# Altium PCB main_board.PcbDoc
Units mm, origin at the board's own origin, x right, y up, seen from the top; angles counter-clockwise.
Board outline 93.7 x 62.75 mm, 2 copper layers (Top Layer, Bottom Layer); 96 components, 66 nets, 378 pads, 214 vias.
Unrouted connection lines stored in the file: 1.
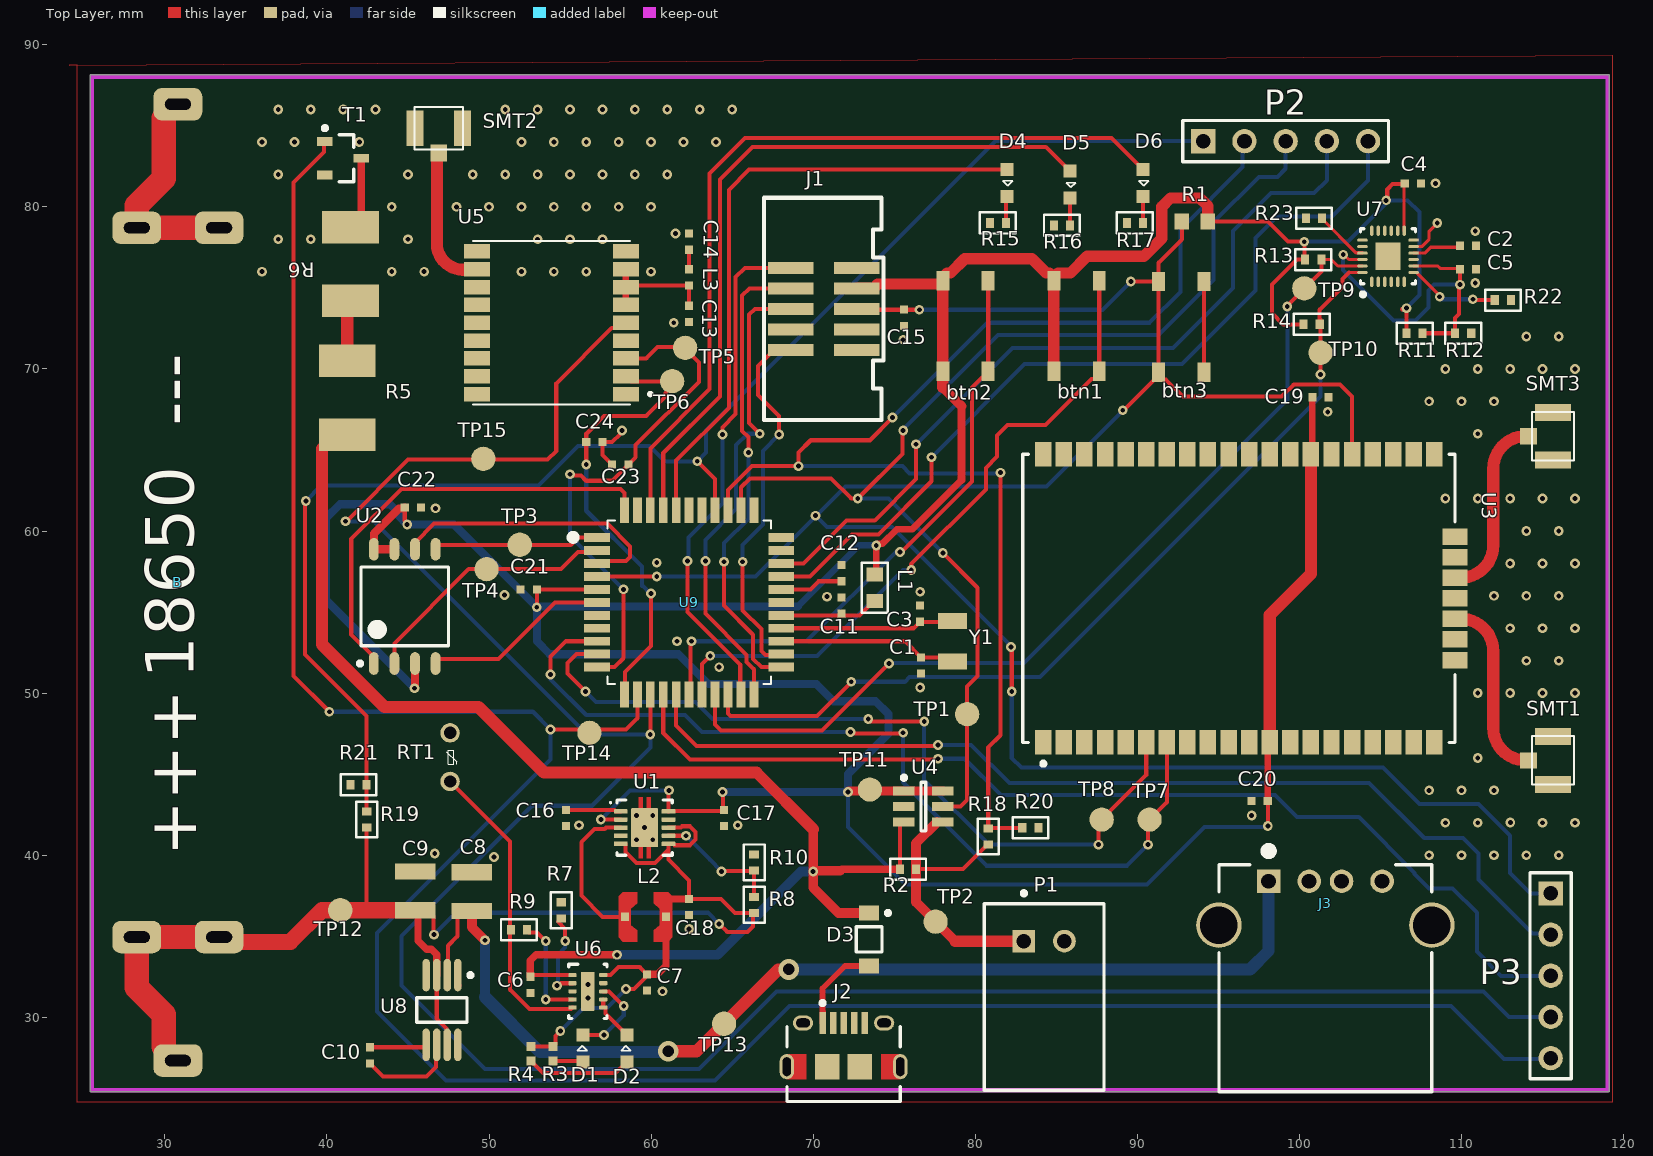
[diagram p0: Top Layer view]
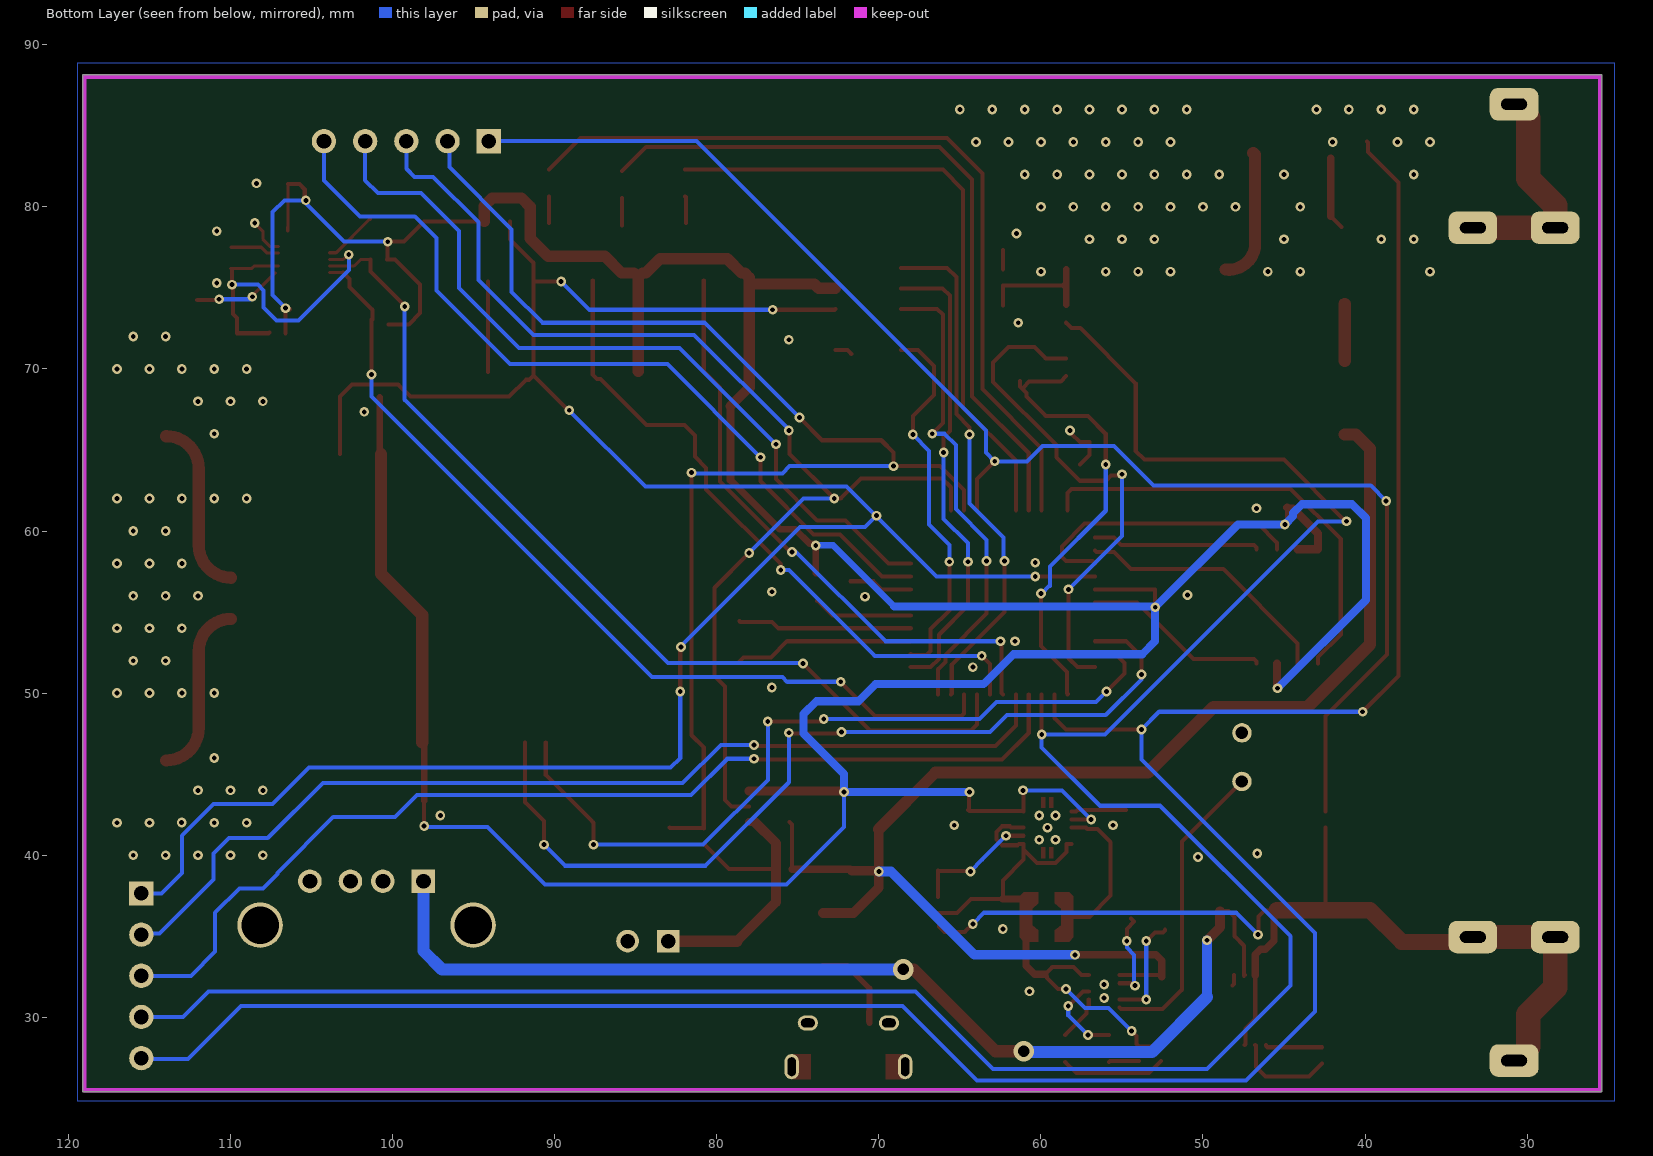
[diagram p1: Bottom Layer view, seen from below]
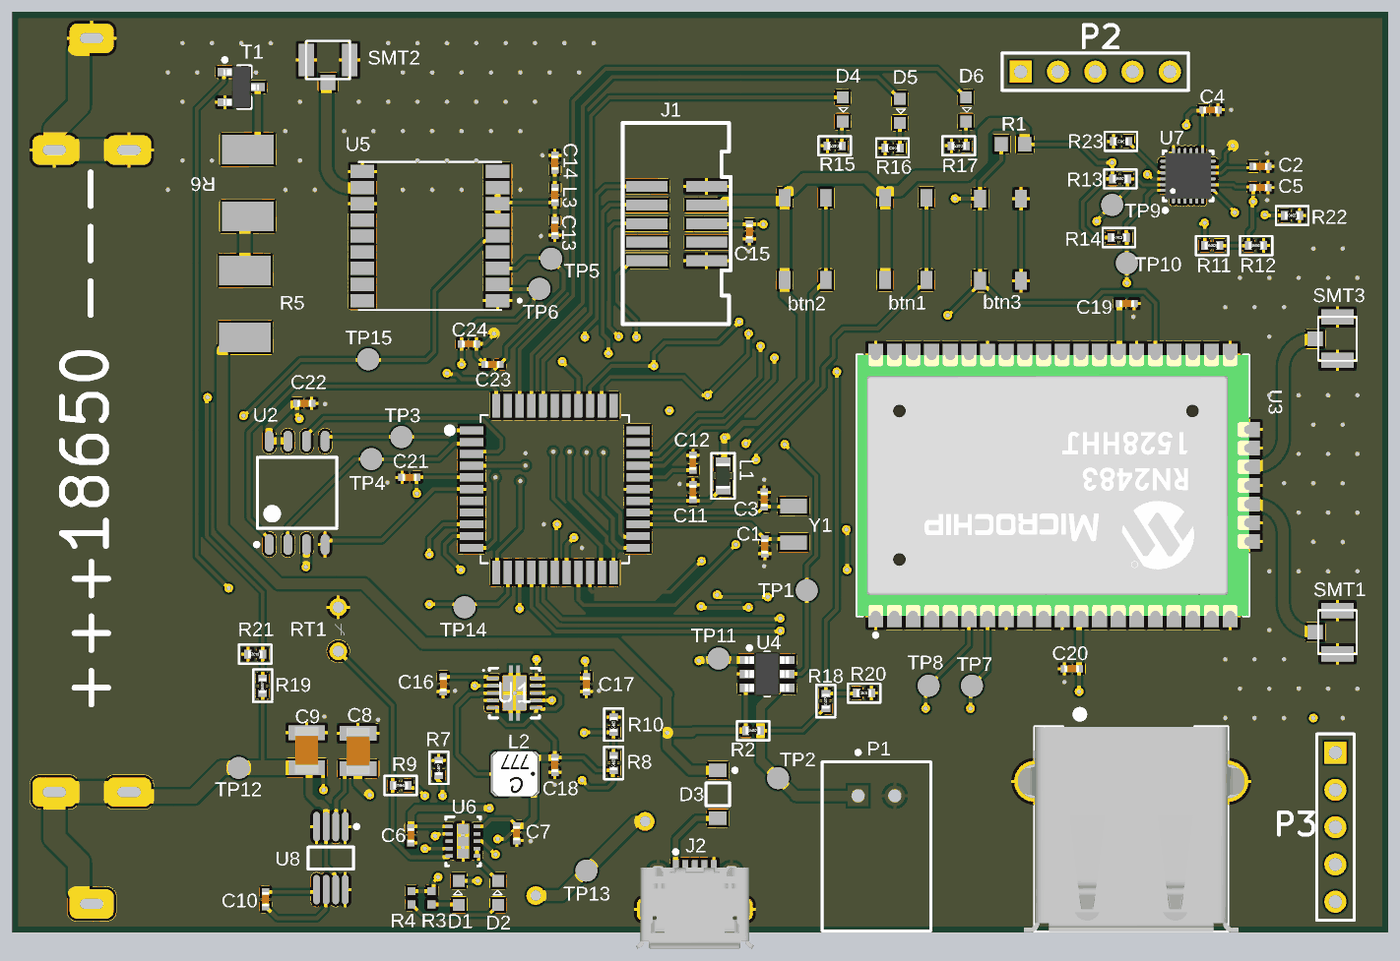
[diagram p2: 3D render of the assembled board from above, using the file's embedded part models]

## Layer stack, top to bottom
Top Solder: solder mask 0.0102, Solder Resist, Dk 3.5
Top Layer: signal copper 0.0356
Dielectric 1: dielectric 0.32, FR-4, Dk 4.8
Bottom Layer: signal copper 0.0356
Bottom Solder: solder mask 0.0102, Solder Resist, Dk 3.5

## Board outline
25.4,25.4 119.1,25.4 119.1,88.15 25.4,88.15

## Design rules (kind name [scope] priority, off if disabled: settings)
Clearance [All] p1: gap=0.16 ignorepadtopadclearanceinfootprint=FALSE except(0: Arc-Text Arc-Hole Track-Text Track-Hole SMDPad-Text SMDPad-Hole THPad-Text THPad-Hole Via-Text Via-Hole Fill-Text Fill-Hole Poly-Text Poly-Hole Region-Text Region-Hole Text-Text Text-Hole)
DiffPairsRouting [All] p1: maxlimit=0.254 minlimit=0.254 mostfreqgap=0.254 toplayer_minwidth=0.16 toplayer_maxwidth=0.381 toplayer_prefwidth=0.2 bottomlayer_minwidth=0.16 bottomlayer_maxwidth=0.381 bottomlayer_prefwidth=0.2 maxuncoupledlength=12.7
Height [All] p1: minheight=0 maxheight=200 prefheight=12.7
HoleSize [All] p1: absolutevalues=TRUE maxlimit=6.35 minlimit=0.3 maxpercent=80.000 minpercent=20.000
MinimumSolderMaskSliver [All] p1: minsoldermaskwidth=0.1
PlaneClearance [All] p1: clearance=1
PlaneConnect [All] p1: planeconnectstyle=Relief reliefexpansion=0.508 reliefentries=4 reliefconductorwidth=1 reliefairgap=0.254
PolygonConnect PolygonConnect_1 [IsVia] p1: connectstyle=Direct reliefconductorwidth=0.254 reliefentries=4 polygonreliefangle="90 Angle" airgapwidth=0.254
PolygonConnect [All] p2: connectstyle=Relief reliefconductorwidth=0.2 reliefentries=4 polygonreliefangle="90 Angle" airgapwidth=0.2
RoutingVias [All] p1: holewidth=0.3 width=0.6 viastyle="Through Hole" minholewidth=0.3 minwidth=0.6 maxholewidth=6.35 maxwidth=10
SilkToSolderMaskClearance [IsPad] p1: minsilkscreentomaskgap=0.178 clearancetoexposedcopper=TRUE
SolderMaskExpansion [All] p1: expansion=0.102
Width [All] p1: maxlimit=5 minlimit=0.16 preferedwidth=0.25 minimp=50.000000 maximp=50.000000 favimp=50.000000
23 further rules are at their usual default settings.

## Components (designator, comment, footprint, x,y, rotation, side; value= is the part's Value field where it differs from the comment)
B "18650" 18650 30.81,27.33 r90 top
btn1 "KSC222G LFS" "KSC222G LFS" 86.25,72.65 r0 top
btn2 "KSC222G LFS" "KSC222G LFS" 79.4,72.65 r0 top
btn3 "KSC222G LFS" "KSC222G LFS" 92.7,72.6 r0 top
C1 "04023C103KAT2A" C0402 76.65,51.7 r90 top value=22pF
C2 "04023C103KAT2A" C0402 110.4,77.6 r180 top value=100nF
C3 "04023C103KAT2A" C0402 76.6,54.9 r270 top value=22pF
C4 "04023C103KAT2A" C0402 107,81.45 r180 top value=100nF
C5 "04023C103KAT2A" C0402 110.4,76.15 r180 top value=100nF
C6 "04023C103KAT2A" C0402 52.55,32 r270 top value=1uF
C7 "04023C103KAT2A" C0402 59.75,32.15 r270 top value=1uF
C8 "TCJB106M016R0100" C3528 45.45,37.8 r90 top value=10uF
C9 "TCJB106M016R0100" C3528 48.95,37.75 r90 top value=10uF
C10 "04023C103KAT2A" C0402 42.65,27.65 r270 top value=1uF
C11 "04023C103KAT2A" C0402 71.75,55.4 r270 top value=100nF
C12 "04023C103KAT2A" C0402 71.75,57.4 r270 top value=100nF
C13 "04023C103KAT2A" C0402 62.35,73.4 r90 top value="56 pF"
C14 "04023C103KAT2A" C0402 62.35,77.85 r270 top value="10 nF"
C15 "04023C103KAT2A" C0402 75.6,73.156 r90 top value=1uF
C16 "04023C103KAT2A" C0402 54.75,42.3 r90 top value=1uF
C17 "04023C103KAT2A" C0402 64.5,42.3 r270 top value=20uF
C18 "04023C103KAT2A" C0402 62.35,36.8 r270 top value=10uF
C19 "04023C103KAT2A" C0402 101.297,68.25 r180 top value=100nF
C20 "04023C103KAT2A" C0402 97.547,43.35 r0 top value=100nF
C21 "04023C103KAT2A" C0402 52.45,56.4 r180 top value=100nF
C22 "04023C103KAT2A" C0402 45.3,61.45 r180 top value=100nF
C23 "04023C103KAT2A" C0402 58.1,64.1 r180 top value="56 pF"
C24 "04023C103KAT2A" C0402 56.5,65.5 r180 top value="56 pF"
D1 "Green LED" "LED 0603" 55.8,28.9 r270 top
D2 "Green LED" "LED 0603" 58.5,28.9 r270 top
D3 "MBR0520L" ONSC-SOD-123-2-425-04_V 73.45,34.8 r270 top
D4 "Green LED" "LED 0603" 81.95,80.65 r90 top
D5 "Green LED" "LED 0603" 85.85,80.55 r90 top
D6 "Green LED" "LED 0603" 90.35,80.65 r90 top
J1 "SHF-105-01-L-D-SM" "JTAG HEADER" 70.65,73.7 r270 top
J2 "10118194-0001LF" FCI-10118194-0001LF-5_V 71.877,28.3 r0 top
J3 "292303-1" TE-292303-1_V 101.6,37.25 r0 top
L1 "MLZ1608A2R2WT" "INDUCTOR 0603" 73.8,56.5 r270 top value=10uH
L2 "LPS3015-222MRB" COIL-LPS3015_V 59.65,36.2 r180 top
L3 "LQG15HN27NJ02D" "INDUCTOR 0402" 62.35,75.65 r90 top value="27 nH"
P1 "S2B-XH-A(LF)(SN)" JST-S2B-XH-A(LF)(SN)_V 84.25,34.7 r0 top
P2 "Header 5" HDR1X5 94.07,84.05 r0 top
P3 "Header 5" HDR1X5 115.5,37.64 r270 top
R1 "10k" RESC0603(1608)_N 93.55,79.1 r0 top
R2 "CRCW04020000Z0ED" R0402 75.85,39.136 r0 top value="0.18 ohm"
R3 "2k" RESC0402(1005)_L 53.95,27.75 r90 top
R4 "2k" RESC0402(1005)_L 52.6,27.75 r90 top
R5 "35228R2JT" R6432 41.2,68.2 r90 top value=8.2ohm
R6 "35228R2JT" R6432 41.5,76.5 r270 top value=8.2ohm
R7 "CRCW04020000Z0ED" R0402 54.45,36.6 r90 top value=1.18kOhm
R8 "CRCW04020000Z0ED" R0402 66.35,36.933 r90 top value=2.26Mohm
R9 "CRCW04020000Z0ED" R0402 51.85,35.4 r180 top value=17.4kohm
R10 "CRCW04020000Z0ED" R0402 66.35,39.55 r90 top value=249kohm
R11 "CRCW04020000Z0ED" R0402 107.1,72.2 r0 top value=165kohm
R12 "CRCW04020000Z0ED" R0402 110.1,72.2 r0 top value=200kohm
R13 "CRCW04020000Z0ED" R0402 100.85,76.75 r0 top value=10kohm
R14 "CRCW04020000Z0ED" R0402 100.75,72.75 r0 top value=10kohm
R15 "CRCW04020000Z0ED" R0402 81.4,79 r180 top value=300
R16 "CRCW04020000Z0ED" R0402 85.35,78.85 r180 top value=300
R17 "CRCW04020000Z0ED" R0402 89.85,79 r180 top value=300
R18 "CRCW04020000Z0ED" R0402 80.8,41.15 r90 top value="? kohm"
R19 "CRCW04020000Z0ED" R0402 42.45,42.2 r90 top value=41.2kohm
R20 "CRCW04020000Z0ED" R0402 83.4,41.7 r0 top value="? kohm"
R21 "CRCW04020000Z0ED" R0402 41.95,44.35 r180 top value=150kohm
R22 "CRCW04020000Z0ED" R0402 112.55,74.25 r0 top value=10kohm
R23 "CRCW04020000Z0ED" R0402 100.9,79.3 r180 top value=10kohm
RT1 "B57164K0103J000" B57164K0103J000 47.6,46.05 r90 top
SMT1 "U.FL-R-SMT" *U.FL-R-SMT_U.FL-R-SMT(Primary) 115.647,45.85 r270 top
SMT2 "U.FL-R-SMT" *U.FL-R-SMT_U.FL-R-SMT(Primary) 46.9,84.85 r0 top
SMT3 "U.FL-R-SMT" *U.FL-R-SMT_U.FL-R-SMT(Primary) 115.647,65.85 r270 top
T1 "DMG6968U" DMG6968U 41,83 r0 top
TP1 "Test point" "TEST POINT" 79.5,48.7 r90 top
TP2 "Test point" "TEST POINT" 77.55,35.9 r90 top
TP3 "Test point" "TEST POINT" 51.9,59.15 r90 top
TP4 "Test point" "TEST POINT" 49.85,57.65 r90 top
TP5 "Test point" "TEST POINT" 62.1,71.3 r90 top
TP6 "Test point" "TEST POINT" 61.3,69.25 r90 top
TP7 "Test point" "TEST POINT" 90.75,42.2 r90 top
TP8 "Test point" "TEST POINT" 87.8,42.2 r90 top
TP9 "Test point" "TEST POINT" 100.3,74.973 r90 top
TP10 "Test point" "TEST POINT" 101.3,71 r90 top
TP11 "Test point" "TEST POINT" 73.5,44.05 r90 top
TP12 "Test point" "TEST POINT" 40.826,36.6 r90 top
TP13 "Test point" "TEST POINT" 64.5,29.6 r90 top
TP14 "Test point" "TEST POINT" 56.2,47.55 r90 top
TP15 "Test point" "TEST POINT" 49.65,64.45 r90 top
U1 "TPS61201DRCT" DRC0010J_V 59.6,41.7 r0 top
U2 "SST25VF080B-50-4I-S2AF" MCHP-SOIC-S2A8_L 44.8,55.35 r90 top
U3 "RN2483A-I/RM103" MCHP-MODULE-47_V 96.897,55.85 r90 top
U4 "MAX44284FAUT+T" MAXM-U6_V 76.8,43 r0 top
U5 "TESEO-LIV3F" *TESEO-LIV3F 53.85,72.85 r270 top
U6 "BQ24210DQCT" DQC0010A 56.1,31.6 r0 top
U7 "ICM-20948" TDK-QFN-24_L 105.464,76.95 r90 top
U8 "MCP1253T-33X50I/MS" MSOP-MS8_M 47.1,30.45 r270 top
U9 "ATMEGA324PB-AU" *QFP80P1200X1200X120-44N 62.35,55.6 r0 top
Y1 "9HT10-32.768KEZC-T" 9HT10-32.768KEZC-T 78.6,51.95 r90 top

## Footprints (in the part's own frame and the unit in brackets; to place one, negate y for a bottom-side part, rotate by r counter-clockwise, add the part's x,y. Pads: shape width x height; smd on the part's side, far side on the other; paste and mask are expansions set on the pad)
9HT10-32.768KEZC-T [mm]
  rect 1x1.8 smd mask+0.2: 1(0,0) 2(2.5,0)
18650 [mm] "18650 battery holder"
  rrect50% 2x3 hole 1.6 slot 0.7 at 0 deg mask+0.2: 1(0,0) 1(7.62,-2.54) 1(7.62,2.54) 2(51.38,-2.54) 2(51.38,2.54) 2(59,0)
*QFP80P1200X1200X120-44N [mm]
  rect 1.6x0.55 smd mask+0.2: 1(-5.68,4) 2(-5.68,3.2) 3(-5.68,2.4) 4(-5.68,1.6) 5(-5.68,0.8) 6(-5.68,0) 7(-5.68,-0.8) 8(-5.68,-1.6) 9(-5.68,-2.4) 10(-5.68,-3.2) 11(-5.68,-4) 23(5.68,-4) 24(5.68,-3.2) 25(5.68,-2.4) 26(5.68,-1.6) 27(5.68,-0.8) 28(5.68,0) 29(5.68,0.8) 30(5.68,1.6) 31(5.68,2.4) 32(5.68,3.2) 33(5.68,4)
  rect 0.55x1.6 smd mask+0.2: 12(-4,-5.68) 13(-3.2,-5.68) 14(-2.4,-5.68) 15(-1.6,-5.68) 16(-0.8,-5.68) 17(0,-5.68) 18(0.8,-5.68) 19(1.6,-5.68) 20(2.4,-5.68) 21(3.2,-5.68) 22(4,-5.68) 34(4,5.68) 35(3.2,5.68) 36(2.4,5.68) 37(1.6,5.68) 38(0.8,5.68) 39(0,5.68) 40(-0.8,5.68) 41(-1.6,5.68) 42(-2.4,5.68) 43(-3.2,5.68) 44(-4,5.68)
  silkscreen extent -7.36,-5.05 5.05,5.05
*TESEO-LIV3F [mm]
  rect 0.9x1.6 smd mask+0.2: 1(4.4,4.6) 2(3.3,4.6) 3(2.2,4.6) 4(1.1,4.6) 5(0,4.6) 6(-1.1,4.6) 7(-2.2,4.6) 8(-3.3,4.6) 9(-4.4,4.6) 10(-4.4,-4.6) 11(-3.3,-4.6) 12(-2.2,-4.6) 13(-1.1,-4.6) 14(0,-4.6) 15(1.1,-4.6) 16(2.2,-4.6) 17(3.3,-4.6) 18(4.4,-4.6)
  silkscreen extent -5.05,-4.85 5.05,6.2
*U.FL-R-SMT_U.FL-R-SMT(Primary) [mm]
  rect 1x1.05 smd mask+0.2: P$1(0,-1.525)
  rect 1.05x2.2 smd mask+0.2: P$2(1.475,0) P$3(-1.475,0)
  silkscreen extent -1.5,-1.3 1.5,1.3
B57164K0103J000 [mm] "Thermistor, through hole, R25=10kohm"
  round 1.2 hole 0.762 mask+0.2: 1(1.5,0) 2(-1.5,0)
  silkscreen extent -0.43,-0.41 0.42,0.23
C0402 [mm]
  rect 0.5x0.5 smd mask+0.2: 1(-0.5,0) 2(0.5,0)
  body extent -0.5,-0.25 0.5,0.25, height 0.5
C3528 [mm] "Low ESR (0.1ohm), 10uF"
  rect 1x2.5 smd mask+0.2: 1(-1.2,0) 2(1.2,0)
  body extent -1.6,-0.8 1.6,0.8, height 1.25
COIL-LPS3015_V [mm] "SMD, 2-Leads, Body 2.95x2.95mm"
  rect 0.5x0.5 smd mask+0.2: 1(-1.27,0) 2(1.27,0)
  Top Layer region: -0.51,1.525 -1.395,1.525 -1.395,1.525 -1.65,1.27 -1.65,-1.27 -1.395,-1.525 -0.51,-1.525 -0.51,-0.825 -0.89,-0.51 -0.89,-0.51 -0.89,0.51 -0.51,0.825 -0.51,0.825
  Top Layer region: 0.51,1.525 1.395,1.525 1.395,1.525 1.65,1.27 1.65,-1.27 1.395,-1.525 0.51,-1.525 0.51,-0.825 0.89,-0.51 0.89,-0.51 0.89,0.51 0.51,0.825 0.51,0.825
  body extent -1.58,-1.58 1.58,1.58, height 1.5
DMG6968U [mm] "SOT23, 3-Leads, Body 2.85x2.35mm, Pitch 1.03mm, IPC Medium Density"
  rect 0.95x0.55 smd mask+0.2: 1(-1.125,1.03) 2(-1.125,-1.03) 3(1.125,0)
  silkscreen extent -1.25,-1.45 0.65,1.98, body extent -1.2,-1.45 1.2,1.45, height 1.02
DQC0010A [mm] "SON, 10-Leads, Body 2x3mm, Pitch 0.5mm, Thermal Pad 2.4x0.84mm"
  rrect40% 0.5x0.25 smd mask+0.2: 1(-0.95,1) 2(-0.95,0.5) 3(-0.95,0) 4(-0.95,-0.5) 5(-0.95,-1) 6(0.95,-1) 7(0.95,-0.5) 8(0.95,0) 9(0.95,0.5) 10(0.95,1)
  rrect12% 0.84x2.4 smd paste-0.42 mask+0.2: 11(0,0)
  silkscreen extent -1.17,-1.68 1.17,1.67, body extent -1.05,-1.55 1.05,1.55, height 0.81
DRC0010J_V [mm] "SON, 10-Leads, Body 3x3mm, Pitch 0.5mm, Thermal Pad 2.4x1.65mm, TI Recommended"
  rrect36% 0.85x0.28 smd paste-0.025 mask+0.2: 1(-1.475,1) 2(-1.475,0.5) 3(-1.475,0) 4(-1.475,-0.5) 5(-1.475,-1) 6(1.475,-1) 7(1.475,-0.5) 8(1.475,0) 9(1.475,0.5) 10(1.475,1)
  rrect6% 1.65x2.4 smd paste-0.825 mask+0.2: 11(0,0)
  Top Layer region: -0.39,-1.9 -0.11,-1.9 -0.11,-1.2 -0.39,-1.2
  Top Layer region: 0.39,-1.2 0.11,-1.2 0.11,-1.9 0.39,-1.9
  Top Layer region: 0.39,1.9 0.11,1.9 0.11,1.2 0.39,1.2
  Top Layer region: -0.39,1.2 -0.11,1.2 -0.11,1.9 -0.39,1.9
  silkscreen extent -2.15,-1.7 1.7,1.7, body extent -1.55,-1.55 1.55,1.55, height 1
FCI-10118194-0001LF-5_V [mm] "SMD, 5-Leads, Body 7x5mm, Pitch 0.65 mm"
  rect 0.4x1.35 smd mask+0.2: 1(-1.3,1.35) 2(-0.65,1.35) 3(0,1.35) 4(0.65,1.35) 5(1.3,1.35)
  oval 1.25x0.95 hole 0.55 slot 0.85 at 0 deg mask+0.2: 6(-2.5,1.35) 7(2.5,1.35)
  oval 0.9x1.55 hole 0.5 slot 1.15 at 90 deg mask+0.2: 8(-3.5,-1.35) 9(3.5,-1.35)
  rect 1.5x1.55 smd mask+0.2: 10(-1,-1.35) 11(1,-1.35)
  Top Layer region: 3.5,-2.125 3.5,-0.575 2.3,-0.575 2.3,-2.125
  Top Layer region: -2.3,-2.125 -2.3,-0.575 -3.5,-0.575 -3.5,-2.125
  silkscreen extent -3.5,-3.5 3.5,2.7, body extent -4.02,-4.03 4.02,1.55, height 2.72
HDR1X5 [mm] "Connector; Header; 5 Position"
  rect 1.5x1.5 hole 0.9: 1(0,0)
  round 1.5 hole 0.9: 2(2.54,0) 3(5.08,0) 4(7.62,0) 5(10.16,0)
  silkscreen extent -1.27,-1.27 11.43,1.27
"INDUCTOR 0402" [mm]
  rect 0.5x0.5 smd mask+0.2: 1(-0.5,0) 2(0.5,0)
  body extent -0.5,-0.25 0.5,0.25, height 0.5
"INDUCTOR 0603" [mm]
  rect 0.88x0.99 smd mask+0.2: 1(-0.815,0) 2(0.815,0)
  silkscreen extent -1.55,-0.8 1.55,0.8, body extent -0.87,-0.48 0.88,0.48, height 0.91
JST-S2B-XH-A(LF)(SN)_V [mm] "Header, 2-Leads, Body 7.4x11.5mm, Pitch 2.5mm"
  rect 1.4x1.4 hole 0.9 mask+0.2: 1(-1.25,0)
  round 1.4 hole 0.9 mask+0.2: 2(1.25,0)
  silkscreen extent -3.7,-9.2 3.7,3.08, body extent -3.7,-9.2 3.7,2.3, height 6.1
"JTAG HEADER" [mil] "10-pin, 1.27 mm"
  rect 29x110 smd mask+7.87: 1(-100,-80) 2(-100,80) 3(-50,-80) 4(-50,80) 5(0,-80) 6(0,80) 7(50,-80) 8(50,80) 9(100,-80) 10(100,80)
  silkscreen extent -270,-145 270,145
"KSC222G LFS" [mm]
  rect 0.8x1.2 smd mask+0.2: 1(-1.4,2.794) 2(-1.4,-2.794) 3(1.4,2.794) 4(1.4,-2.794)
  body extent -2.29,-3.06 2.29,3.05, height 1.5
"LED 0603" [mm] "1.6mmX0.8mm SMD, 2mA"
  rect 0.8x0.8 smd mask+0.2: 1(1.65,0) 2(0,0)
  silkscreen extent 0.65,-0.35 0.95,0.25
MAXM-U6_V [mm] "SOT23, 6-Leads, Body 3x1.75mm, Pitch 0.95mm"
  rect 1.33x0.56 smd mask+0.2: 1(-1.2,0.95) 2(-1.2,0) 3(-1.2,-0.95) 4(1.2,-0.95) 5(1.2,0) 6(1.2,0.95)
  silkscreen extent -1.32,-1.5 0.15,1.9, body extent -1.5,-1.5 1.5,1.5, height 1.45
MCHP-MODULE-47_V [mil] "SMD, 47-Leads, Body 26.67x17.78mm, Pitch 1.27mm"
  rect 60x40 smd mask+7.87: 1(-350,500) 2(-350,450) 3(-350,400) 4(-350,350) 5(-350,300) 6(-350,250) 7(-350,200) 8(-350,150) 9(-350,100) 10(-350,50) 11(-350,0) 12(-350,-50) 13(-350,-100) 14(-350,-150) 15(-350,-200) 16(-350,-250) 17(-350,-300) 18(-350,-350) 19(-350,-400) 20(-350,-450) 28(350,-450) 29(350,-400) 30(350,-350) 31(350,-300) 32(350,-250) 33(350,-200) 34(350,-150) 35(350,-100) 36(350,-50) 37(350,0) 38(350,50) 39(350,100) 40(350,150) 41(350,200) 42(350,250) 43(350,300) 44(350,350) 45(350,400) 46(350,450) 47(350,500)
  rect 40x60 smd mask+7.87: 21(-150,-500) 22(-100,-500) 23(-50,-500) 24(0,-500) 25(50,-500) 26(100,-500) 27(150,-500)
  silkscreen extent -407,-500 350,550, body extent -350,-500 350,550, height 131
MCHP-SOIC-S2A8_L [mm] "SOIC, 8-Leads, Body 5.275x5.275mm, Pitch 1.27mm, IPC High Density"
  oval 1.4x0.6 smd mask+0.2: 1(-3.525,1.905) 2(-3.525,0.635) 3(-3.525,-0.635) 4(-3.525,-1.905) 5(3.525,-1.905) 6(3.525,-0.635) 7(3.525,0.635) 8(3.525,1.905)
  silkscreen extent -3.65,-2.7 2.43,2.88, body extent -2.7,-2.7 2.7,2.7, height 2.16
MSOP-MS8_M [mm] "TSOP, 8-Leads, Body 3x3mm, Pitch 0.65mm, IPC Low Density"
  oval 2x0.45 smd mask+0.2: 1(-2.15,0.975) 2(-2.15,0.325) 3(-2.15,-0.325) 4(-2.15,-0.975) 5(2.15,-0.975) 6(2.15,-0.325) 7(2.15,0.325) 8(2.15,0.975)
  silkscreen extent -2.27,-1.55 0.75,1.88, body extent -1.55,-1.55 1.55,1.55, height 1.1
ONSC-SOD-123-2-425-04_V [mm] "SOD, 2-Leads, Body 2.69x1.6mm"
  rect 0.91x1.22 smd mask+0.2: 1(-1.635,0) 2(1.635,0)
  silkscreen extent -1.76,-0.8 0.78,1.29, body extent -1.35,-0.8 1.35,0.8, height 1.35
R0402 [mm]
  rect 0.5x0.6 smd mask+0.2: 1(-0.5,0) 2(0.5,0)
  silkscreen extent -1.1,-0.65 1.11,0.64, body extent -0.5,-0.25 0.5,0.25, height 0.35
R6432 [mm] "3W resistor SMD"
  rect 2x3.5 smd mask+0.2: 1(-2.25,-0.05) 2(2.3,-0.05)
RESC0402(1005)_L [mm] "Chip Resistor, 2-Leads, Body 1,00x0,50mm, IPC Medium Density"
  rect 0.55x0.55 smd mask+0.2: 1(-0.45,0) 2(0.45,0)
  body extent -0.53,-0.27 0.53,0.28, height 0.37
RESC0603(1608)_N [mm] "Chip Resistor, Body 1.6x0.8mm, IPC Medium Density"
  rect 0.9x1 smd mask+0.2: 1(-0.8,0) 2(0.8,0)
  body extent -0.85,-0.47 0.85,0.47, height 0.6
TDK-QFN-24_L [mm] "QFN, 24-Leads, Body 3.10x3.10mm, Pitch 0.40mm, Thermal Pad 1.70x1.54mm, IPC High Density"
  oval 0.65x0.2 smd mask+0.2: 1(-1.575,1) 2(-1.575,0.6) 3(-1.575,0.2) 4(-1.575,-0.2) 5(-1.575,-0.6) 6(-1.575,-1) 13(1.575,-1) 14(1.575,-0.6) 15(1.575,-0.2) 16(1.575,0.2) 17(1.575,0.6) 18(1.575,1)
  oval 0.2x0.65 smd mask+0.2: 7(-1,-1.575) 8(-0.6,-1.575) 9(-0.2,-1.575) 10(0.2,-1.575) 11(0.6,-1.575) 12(1,-1.575) 19(1,1.575) 20(0.6,1.575) 21(0.2,1.575) 22(-0.2,1.575) 23(-0.6,1.575) 24(-1,1.575)
  rect 1.7x1.54 smd mask+0.2: 25(0,0)
  silkscreen extent -2.47,-1.7 1.7,1.7, body extent -1.55,-1.55 1.55,1.55, height 1.05
TE-292303-1_V [mm] "THD, 4-Leads, Body 13.13x14mm, Pitch 2.5mm"
  rect 1.45x1.45 hole 0.92 mask+0.2: 1(-3.5,1.144)
  round 1.45 hole 0.92 mask+0.2: 2(-1,1.144) 3(1,1.144) 4(3.5,1.144)
  round 2.8 hole 2.3 mask+0.2: 5(-6.57,-1.566) 6(6.57,-1.566)
  silkscreen extent -6.57,-11.85 6.57,3.25, body extent -8.12,-11.85 8.12,2.15, height 7.72
"TEST POINT" [mm]
  round 1.5 smd: 1(0,0)

## Part data
btn1 btn2 btn3: "Button SMD"
  btn1: Type=SW1
  btn2: Type=SW2
  btn3: Type=RST
C1 C2 C3 C4 C5 C6 C7 C10 C11 C12 C13 C14 C15 C16 C17 C18 C19 C20 C21 C22 C23 C24: "C0402"
C8 C9: "C3528, low ESR (0.1ohm)"
D1 D2 D4 D5 D6: "LED, green, 0603, 2mA, 2.65V, SMD"
D3: library part CMP-2000-04926-1, "Schottky Diode, 20V, 0.2A, 2-pin SOD-123, RoHS, Tape and Reel", Manufacturer=FairchildSemiconductor, Operating Temperature=-65to125degC, Package=2SOD-123, Package Description="2-Pin Small Outline Diode, Body 2.69 x 1.6 mm", Package Reference=SOD-123-2-425-04, Peak Average Forward Current=0.5A, Peak Forward Voltage=0.385V, Peak Non-Repetitive Surge Current=5.5A, Peak Reverse Current=250uA, Peak Reverse Repetitive Voltage=20V, Category=Rectifier, Configuration=Single, Datasheet URL=https://datasheet.ciiva.com/5739/1684450-5739282.pdf, Datasheet Version="Rev. C0, 03/2012", Manufacturer URL=https://www.fairchildsemi.com/, Mounting=SurfaceMount, Packaging=Tape&Reel, Rad Hard=No, Type=SchottkyDiode
J1: "JTAG, 10 pin, 1.27mm", Type=JTAG
J2: library part CMP-2000-05120-1, "Micro USB B Type Receptacle, 1.8 A, -55 to 85 degC, 5-Pin SMD, RoHS, Tape and Reel", Manufacturer="Amphenol FCI", Package Description="5-Pin Surface Mount Device, Body 8.05 x 5.53 mm, Pitch 0.65 mm", Package Reference=10118194-0001LF-5, Body Orientation=RightAngle, Datasheet URL=https://datasheet.ciiva.com/26945/getdatasheetpartid-418619-26945695.pdf, Datasheet Version="Rev. A, 10/2011", Gender=RCP, Manufacturer URL=http://www.fci.com/, Mounting=SurfaceMount, Number of Contacts=5, Packaging=CutTape, Pitch=0.65mm, Rad Hard=No, Termination Method=Solder, Type=MicroUSBTypeB
J3: library part CMP-2000-05404-1, "1 Port Right Angle Through Hole Mount Female Type A USB Connector, 4 Position, -55 to 85 degC, RoHS, Tube", Manufacturer="TE Connectivity", Package Description="4-Pin Through Hole Device, Body 14 x 13.13 mm, Pitch 2.5 mm", Connector Mounting=PCB, Connector Type=USBA, Contact Material=Copper, Contact Plating=Gold, Contact Termination Type=Solder, Datasheet URL=http://www.farnell.com/cad/1653030.pdf, Datasheet Version=Feb-12, Gender=Receptacle, Manufacturer URL=http://www.te.com/, No. of Contacts=4, Package Reference=292303-1, SVHC=NoSVHC(16-Jun-2014)
L1: "Inductor 0603"
L2: library part CMP-2000-06574-1, "Shielded Power Inductor, 2.2 uH, +/- 20%, 110 mOhm, -40 to 85 degC, 2-Pin SMD, RoHS, Tape and Reel", Inductance=2.2uH, Manufacturer=Coilcraft, Maximum DC Current=2.1A, Maximum DC Resistance=110mOhms, Operating Temperature Range=-40Cto+85C, Package Description="2-Pin Surfave Mount Device, Body 2.95 x 2.95 mm", Package Reference=LPS3015, Self Resonant Frequency=110MHz, Test Frequency=100kHz, Tolerance=20%, =LPS3015-222MRC, Brand=Coilcraft, Core Material=Ferrite, Datasheet URL=http://www.coilcraft.com/pdfs/lps3015.pdf, Datasheet Version=09/2015, Factory Pack Quantity=1, Height=1.4mm, Length=3mm, Manufacturer URL=http://www.coilcraft.com/, Mounting Style=SMD/SMT, Mounting Technology=SurfaceMount, Packaging=CutTape, Product=PowerInductors, Product Category=FixedInductors, Qualification=AEC-Q200, RoHS=True, Series=LPS3015, Shielding=Shielded, Termination Style=SMD/SMT, Type=ShieldedPowerInductor, Unit Weight=0.001411oz, Width=3mm
L3: "Inductor 0402"
P1: library part CMP-1755-00005-1, "Male Header, Pitch 2.5 mm, 1 x 2 Position, Height 6.1 mm, Tail Length 3.4 mm, -25 to 85 degC, RoHS, Bulk", Capacitance="1 nF", Case\Package=Radial, Max Operating Temperature="125 degC", Min Operating Temperature="-55 degC", Package Quantity=500, Tolerance=10%, Type (Capacitors)=X7R, Voltage Rating="100 V", ComponentLink1Description="Manufacturer URL", ComponentLink1URL=http://www.jst.com/home2.html, ComponentLink2Description=Datasheet, ComponentLink2URL=http://www.jst-mfg.com/product/pdf/eng/eXH.pdf, DatasheetVersion=May-16, Height="2.54 mm", Lead Pitch="2.54 mm", Length="5.33 mm", Mount="Through Hole", PackageDescription="Male Header, Pitch 2.5 mm, 1 x 2 Position, Height 6.1 mm, Tail Length 3.4 mm", PackageReference=S2B-XH-A(LF)(SN), Packaging=Bulk, Pins=2, Radiation Hardening=No, REACH SVHC="No SVHC", RoHSCompliant=true, Voltage Rating (DC)="100 V", Width="3.81 mm"
P2 P3: "Header, 5-Pin", LatestRevisionDate=17-Jul-2002, LatestRevisionNote="Re-released for DXP Platform.", Publisher="Altium Limited"
R1: library part 5264, "0.1W 1% Thick film resistor", antall=1200, dybde=3, hylle=6, id=5264, komponenttype=1, lager_type=Baklager, leverandor=Farnell, leverandor_varenr=2447230, navn=10k, nokkelord="Resistor Motstand", pakke_opprettet="08.07.2014 21:15:30", pakke_opprettet_av=815, pakketype=0603, pris=0, produsent=Multikomp, rad=1, rom=OV, symbol_opprettet="08.07.2014 21:16:33", symbol_opprettet_av=815
R2 R7 R8 R9 R10 R11 R12 R13 R14 R15 R16 R17 R18 R19 R20 R21 R22 R23: "R0402"
R3 R4: library part 5677, "0.1W 1% Thick film resistor", id=5677, komponenttype=1, navn=56k, pakke_opprettet="12.05.2019 22:25:28", pakke_opprettet_av=1855, pakketype=0402, pris=0, symbol_opprettet="08.07.2014 21:16:33", symbol_opprettet_av=815
R5 R6: "R6432, 3W"
RT1: "Thermistor, through hole"
SMT1 SMT2 SMT3: Package=None, Availability=Unavailable, MF="Hirose Electric", MP=U.FL-R-SMT, Price=None, SnapEDA_Link=https://www.snapeda.com/parts/U.FL-R-SMT/Hirose%20Electric%20Co%20Ltd/view-part/?ref=snap
T1: "NMOS 6.5A 500mV", Cont. drain current=6.5A, Supplier Part Number 1=1843757, Threshold voltage=500mV, Supplier 1=Farnell
U1: library part CMP-0343-00033-2, "Boost Voltage Converter with 0.3 to 5.5 V Input and 3.3 V Output, -40 to 85 degC, 10-Pin SON (DRC), Green (RoHS & no Sb/Br)", Manufacturer="Texas Instruments", Switching Frequency(Max)(kHz)=1250, ComponentLink1Description=Datasheet, ComponentLink1URL=http://www.ti.com/general/docs/lit/getliterature.tsp?genericPartNumber=TPS61201&fileType=pdf, ComponentLink2Description="Package Specification", ComponentLink2URL=http://www.ti.com/litv/pdf/mpds117k, DatasheetVersion=SLVS577B, Eco-Plan="Green (RoHS & no Sb/Br)", Mounting Technology="Surface Mount", PackageDescription="10-Pin Plastic Small Outline No-Lead, 3 x 3 x 1 mm Body, 0.5 mm Pitch, Exposed Pad", PackageReference=DRC0010J, PackageVersion="revL, Sep-2011", PartNumber=TPS61201DRCT, Preset Vout(V)=3.3, Regulated Outputs(#)=1, SubFamily="Step-Up Regulator", Synchronous Rectification=TRUE, Topology=Boost, Vin(Max)(V)=5.5, Vin(Min)(V)=0.3, Vout(Max)(V)=3.3, Vout(Min)(V)=3.3
U2: library part CMP-0378-00062-1, "8 Mbit SPI Serial Flash, 2.7 to 3.6 V, 50 MHz, -40 to 85 degC, 8-pin SOIC (S2A8), Tube", Manufacturer=Microchip, ComponentLink1Description="Manufacturer URL", ComponentLink1URL=http://www.microchip.com, ComponentLink2Description=Datasheet, ComponentLink2URL=http://ww1.microchip.com/downloads/en/DeviceDoc/25045A.pdf, ComponentLink3Description="Package Specification", ComponentLink3URL=http://ww1.microchip.com/downloads/en/DeviceDoc/25051A.pdf, ComponentLink4Description="Product URL", ComponentLink4URL=http://www.microchip.com/SST25VF080B, DatasheetVersion="Rev. A", Mounting Technology="Surface Mount", PackageDescription="8-Lead Plastic Small Outline Intergrated Circuit, 5.275 x 5.275 mm Body, 1.27 mm Pitch", PackageReference=SOIC-S2A8, PackageVersion="Rev. A", PartNumber=SST25VF080B-50-4I-S2AF, Type=FLASH
U3: library part CMP-2000-07478-1, "Low-Power Long Range LoRa(R) Technology Transceiver Module, 2.1 to 3.6 V, -40 to 85 degC, 47-Pin SMD, RoHS, Tray", Manufacturer=Microchip, Package Description="47-Pin Surface Mount Device, Body 26.67 x 17.78 mm, Pitch 1.27 mm", Package Reference=MODULE-47, Datasheet URL=http://www.microchip.com/mymicrochip/filehandler.aspx?ddocname=en574289, Datasheet Version="Rev. C, 04/2017", Manufacturer URL=http://www.microchip.com/, Mounting Technology=SurfaceMount, RoHSCompliant=false
U4: library part CMP-2000-06663-1, "Input Common-Mode, High-Precision, Low-Power Current-Sense Amplifier, 3 KHz, 2 nA, 1.7 to 5.5 V, -40 to 125 degC, 6-Pin SOT23 (U6+1), RoHS, Tape and Reel", Current - Input Bias=2nA, Current - Supply=21µA, Manufacturer=Maxim, Operating Temperature=-40°C~125°C, Package / Case=SOT-6, Package Description="6-Pin Small Outline Transistor, Body 2.9 x 1.625 mm, Pitch 0.95 mm", Package Reference=U6+1, Standard Package=2,500, Supplier Device Package=6-SOT, Voltage - Input Offset=2µV, Voltage - Supply, Single/Dual (±)=1.7V~5.5V, -3db Bandwidth=3kHz, Amplifier Type=CurrentSense, Category=IntegratedCircuits(ICs), Datasheet URL=https://datasheets.maximintegrated.com/en/ds/MAX44284.pdf, Datasheet Version="Rev. 4, 01/2015", Family=Linear-Amplifiers-Instrumentation,OPAmps,BufferAmps, Manufacturer URL=http://www.maximintegrated.com/, Mounting Technology=SurfaceMount, Mounting Type=SurfaceMount, Number of Circuits=1, Package URL=http://pdfserv.maximintegrated.com/package_dwgs/21-0058.PDF, Packaging=Tape&Reel(TR)
U5: "- RF Receiver BeiDou, Galileo, GLONASS, GNSS, GPS 1.575GHz -163dBm 18-LCC _9.7x10.1_", Package="SMD-18 STMicroelectronics", Availability=Unavailable, MF=STMicroelectronics, MP=TESEO-LIV3F, Price=None, SnapEDA_Link=https://www.snapeda.com/parts/TESEO-LIV3F/STMicroelectronics/view-part/1474256/?ref=snap
U6: library part CMP-0321-00481-2, "800 mA, Single-Input, Single Cell Li-Ion Solar Battery Charger, 3.5 V, -40 to 85 degC, 10-pin WSON (DQC), Green (RoHS & no Sb/Br)", Manufacturer="Texas Instruments", Over Voltage Protection=N, ComponentLink1Description=Datasheet, ComponentLink1URL=http://www.ti.com/general/docs/lit/getliterature.tsp?genericPartNumber=BQ24210&fileType=pdf, DatasheetVersion=SLUSA76A, Eco-Plan="Green (RoHS & no Sb/Br)", Lead Acid=N, Li-Ion=N, Li-Polymer=N, Mounting Technology="Surface Mount", NiCd=N, NiMH=N, PackageDescription="10-Pin Plastic Small Outline No-Lead, 2 x 3 x 0.8 mm Body, 0.5 mm Pitch, Exposed Pad", PackageReference=DQC0010A, PackageVersion="revA, Jul-2008", PartNumber=BQ24210DQCT, SubFamily="Battery Charge Management", Vin(Min)(V)=3.5
U7: library part CMP-2000-07532-1, "World’s Lowest Power 9-Axis MEMS MotionTracking(TM) Device, 1.71 to 3.6 V, -40 to 85 degC, 24-Pin QFN, RoHS, Tape and Reel", Manufacturer=TDK, Package Description="24-Pin Quad Flat No-lead Package, Body 3 x 3 mm, Pitch 0.4 mm", Package Reference=QFN-24, Datasheet URL=https://www.invensense.com/wp-content/uploads/2016/06/DS-000189-ICM-20948-v1.3.pdf, Datasheet Version="Rev. 1.3, 06/2017", Manufacturer URL=http://www.tdk.com/, Mounting Technology=SurfaceMount
U8: library part CMP-0132-00083-1, "Low Noise, Positive-Regulated Charge Pump, 1MHz, Fixed Output, 8-Pin MSOP, Industrial Temperature, Tape and Reel", DatasheetVersion="revA, Nov-2002", PackageDescription="8-Lead Plastic Micro Small Outline Package (MS) [MSOP]", PackageReference=MSOP-MS8, PackageVersion="revBB, Aug-2009"
U9: "Avr, 32kb Flash, 1kb Ee, 2kb Ram - 20mhz, Tqfp, Ind Temp, Green 5 v/ Tqfp _a_", Package="TQFP-44 Microchip", Availability=Unavailable, MF=Microchip, MP=ATMEGA324PB-AU, Price=None, SnapEDA_Link=https://www.snapeda.com/parts/ATMEGA324PB-AU/Microchip/view-part/?ref=snap
Y1: "Crystal 32.768kHz, SMD, 3.2mm x 1.5mm, 9pF, 10 ppm"
TP1 TP2 TP3 TP4 TP5 TP6 TP7 TP8 TP9 TP10 TP11 TP12 TP13 TP14 TP15: Type=I2C/SCL

## Via types
v1: diameter 0.6, hole 0.3, Top Layer to Bottom Layer, tented both sides, 133 vias
v2: diameter 0.6, hole 0.3, Top Layer to Bottom Layer, 79 vias
v3: diameter 1.27, hole 0.711, Top Layer to Bottom Layer, 2 vias

## Nets (pads, with @x,y where several pads share a name; then routed paths per layer and width w, separated by ;. In a path a pad name is that pad's centre, name@x,y a point inside that pad or via, vN(x,y) a via of type N, cw(c..) or ccw(c..) an arc to the next point about the centre after c; other vN are vias at no path point)
GND: B.2 btn3.3 btn3.4 C1.1 C2.1 C3.1 C4.1 C5.1 C6.2 C7.2 C8.2 C9.2 C11.1 C12.1 C13.1 C14.1 C15.1 C16.1 C17.2 C18.2 C19.1 C20.1 C21.2 C22.1 C23.2 C24.1 J1.2 J1.10 J2.5 J2.6 J2.7 J2.8 J2.9 J2.10 J2.11 J3.4 J3.5 J3.6 P1.2 R7.2 R10.2 R12.2 R15.2 R16.2 R17.2 R20.2 R21.2 R22.2 R23.2 RT1.1 SMT1.P$2 SMT1.P$3 SMT2.P$2 SMT2.P$3 SMT3.P$2 SMT3.P$3 T1.2 U1.4 U1.9 U1.11 U2.4 U3.1 U3.8 U3.11 U3.20 U3.21 U3.22 U3.24 U3.26 U3.27 U3.28 U3.33 U3.41 U3.47 U4.2 U5.1 U5.10 U5.12 U6.3 U6.11 U7.11 U7.18 U8.1 U8.4 U8.8 U9.6 U9.28 | length 38.3
  Top Layer w0.2: U7.11 107.54,77.55 108,78.01 108,78.5 v2(108.5,79)
  Top Layer w0.25: B.2@29.935,85.484 30.781,86.33 B.2@30.81,86.33 ; U2.4 46.705,51.938 46.867,52.1 50.577,52.1 54.077,55.6 U9.6 ; U8.1 48.075,32.042 U8.1@48.167,31.95 ; C23.2 57,64.7 C24.1 57.6,65.5 58.1,66 58.1,66.005 58.2,66.105 v2(58.2,66.2) ; J1.10@71.7,70.917 71.943,71.16 J1.10 ; btn3.4 btn3.3
  Top Layer w1.5: B.2@29.935,85.484 29.935,81.75 28.27,80.085 28.27,78.71 B.2@33.35,78.71
  other v1: 56.1,31.184 60.7,31.6 56.1,32.016 62.35,35.45 50.314,39.886 108,40 110,40 112,40 116,40 46.65,40.1 59.1,40.95 60.1,40.95 59.6,41.7 55.55,41.85 65.35,41.85 109,42 111,42 113.014,42.014 115,42 117,42 59.1,42.45 60.1,42.45 97.05,42.45 108,44 110,44 112,44 111,46 111,50 113,50 115,50 117,50 76.6,50.35 64.2,51.6 114,52 116,52 61.6,53.2 113,54 115,54 117,54 70.85,55.95 112,56 114,56 116,56 50.95,56.05 76.6,56.25 113,58 115,58 117,58 60.35,58.05 114,60 116,60 46.7,61.4 109,62 111,62 113,62 115,62 117,62 111,66 101.75,67.35 108,68 110,68 112,68 109,70 111,70 113,70 115,70 117,70 75.55,71.8 114,72 116,72 61.4,72.85 110.85,75.3 36,76 44,76 46,76 52,76 54,76 56,76 60,76 37,78 39,78 45,78 53,78 55,78 57,78 61.5,78.35 110.85,78.5 44,80 48,80 50,80 52,80 54,80 56,80 58,80 60,80 108.4,81.45 37,82 45,82 49,82 51,82 53,82 55,82 57,82 59,82 61,82 36,84 38,84 42,84 52,84 54,84 56,84 58,84 60,84 62,84 64,84 37,86 39,86 41,86 43,86 51,86 53,86 55,86 57,86 59,86 61,86 63,86 65,86
GPIO1: P3.5 T1.1 TP14.1 U9.13 | length 157.4
  Top Layer w0.25: T1.1 39.825,83.98 39.825,83.38 37.95,81.505 37.95,51.05 v2(40.15,48.85) ; v2(53.8,47.75) 58.45,47.75 59.15,48.45 U9.13
  Bottom Layer w0.25: v2(40.15,48.85) 52.7,48.85 v2(53.8,47.75) 53.8,45.9 43.1,35.2 43.1,30.35 47.35,26.1 63.95,26.1 68.55,30.7 109.35,30.7 112.625,27.425 115.445,27.425 P3.5
GPIO2: btn2.3 btn2.4 U9.17 | length 37.5
  Top Layer w0.25: U9.17 62.433,50.003 62.433,53.133 v2(62.5,53.2) ; v2(75.35,58.7) 75.457,58.7 79.8,63.043 79.8,68.856 btn2.4 btn2.3
  Bottom Layer w0.25: v2(62.5,53.2) 69.6,53.2 75.1,58.7 v2(75.35,58.7)
GPIO3: btn1.3 btn1.4 U9.18 | length 41.3
  Top Layer w0.25: U9.18 63.15,51.8 v2(63.65,52.3) ; v2(76.05,57.6) 76.05,57.95 80.65,62.55 80.65,63.9 81.334,64.584 81.334,65.884 82,66.55 84.344,66.55 87.175,69.381 87.375,69.381 87.65,69.656 btn1.4 btn1.3
  Bottom Layer w0.25: v2(63.65,52.3) 70.25,52.3 75.55,57.6 v2(76.05,57.6)
GPIO4: P3.4 TP15.1 U5.5 U9.14 | length 151.2
  Top Layer w0.25: v2(41.15,60.6) 41.2,60.6 45,64.4 53.6,64.4 54.15,64.95 54.15,69.103 57.572,72.525 58.125,72.525 U5.5 ; v2(59.95,47.45) U9.14
  Bottom Layer w0.25: v2(41.15,60.6) 42.9,60.6 56.05,47.45 v2(59.95,47.45) 59.95,46.65 56.35,43.05 52.65,43.05 44.6,35 44.6,31.95 49.75,26.8 62.95,26.8 67.75,31.6 111.35,31.6 112.93,30.02 P3.4
LED1: D4.1 U9.40 | length 38.8
  Top Layer w0.25: U9.40 61.55,64.35 64.8,67.6 64.8,81.05 66.05,82.3 D4.1
LED2: D5.1 U9.41 | length 44.9
  Top Layer w0.25: U9.41 60.75,64.8 64.25,68.3 64.25,81.7 66.25,83.7 84.35,83.7 D5.1
LED3: D6.1 U9.42 | length 50.8
  Top Layer w0.25: U9.42 59.95,65.1 63.6,68.75 63.6,82.05 65.8,84.25 88.4,84.25 D6.1
MISO0: TP4.1 U2.2 U9.2 | length 16.1
  Top Layer w0.25: U2.2 44.165,53.065 48.75,57.65 49.45,57.65 54.45,57.65 55.495,58.695 56.565,58.695 U9.2
MOSI0: TP3.1 U2.5 U9.1 | length 10.3
  Top Layer w0.25: U2.5 46.705,58.988 46.867,59.15 55.045,59.15 55.495,59.6 U9.1
NetC2_2: C2.2 U7.10 | length 3.1
  Top Layer w0.2: U7.10 107.739,77.15 108.089,77.5 C2.2@109.95,77.5
NetC5_2: C5.2 R11.2 R12.1 U7.8 U7.22 | length 21.4
  Top Layer w0.2: v2@102.75,77.05 103.05,76.75 U7.22 ; U7.8 108.537,76.35 108.687,76.2 C5.2@110,76.2
  Top Layer w0.25: v2(102.7,77.05) v2@102.75,77.05 ; R11.2@107.6,72.25 107.65,72.2 R12.1 109.6,73.15 109.85,73.4 109.85,75.15 v2(109.9,75.2) C5.2
  Bottom Layer w0.25: v2(102.7,77.05) 102.7,76.1 105.8,73 107.15,73 107.95,73.8 107.95,74.85 108.3,75.2 v2(109.9,75.2)
NetC6_1: C6.1 D3.1 R2.1 R5.1 U4.3 U6.1 | length 88.5
  Top Layer w0.25: C6.1 52.65,32.6 U6.1 ; v2(70,39) v2@70.035,39.035 ; R2.1 75.35,41.895 U4.3@75.505,42.05
  Top Layer w0.45: C6.1 52.55,33.499 52.901,33.85 v2(57.9,33.85) ; 71.67,39.035 71.771,39.136 R2.1
  Top Layer w0.6: 70,41.6 v2(70,39) 70,38 71.565,36.435 D3.1 ; v2@70.035,39.035 71.67,39.035
  Top Layer w0.7: 66.5,45.1 70,41.6
  Top Layer w0.75: R5.1 40.575,65.95 39.7,65.075 39.7,53 43.55,49.15 49.35,49.15 53.4,45.1 66.5,45.1
  Bottom Layer w0.6: v2(57.9,33.85) 64.1,33.85 69.25,39 v2(70,39)
NetC9_1: C9.1 J3.1 TP13.1 U8.2 | length 67.2
  Top Layer w0.25: U8.2@47.463,32.562 U8.2 47.463,32.638 47.463,34.413 48.05,35 48.05,36.175 48.425,36.55 C9.1
  Top Layer w0.6: C9.1 48.95,35.55 v2(49.75,34.75)
  Top Layer w0.75: v3(61.05,27.9) 62.8,27.9 67.85,32.95 v3(68.5,32.95)
  Bottom Layer w0.6: 49.75,31.25 v2(49.75,34.75)
  Bottom Layer w0.75: 49.75,31.25 53.15,27.85 61,27.85 v3(61.05,27.9) ; v3(68.5,32.95) 96.95,32.95 98.1,34.1 J3.1
NetC10_1: C10.1 U8.5 | length 3.6
  Top Layer w0.25: C10.1 46.033,28.15 46.125,28.242 U8.5
NetC10_2: C10.2 U8.6 | length 6
  Top Layer w0.25: C10.2 43.45,26.35 46.15,26.35 46.737,26.937 46.737,28.262 U8.6
NetC11_2: C11.2 L1.2 U9.27 | length 6.1
  Top Layer w0.25: U9.27 72.86,54.8 73.745,55.685 L1.2
NetC12_2: C12.2 U9.29 | length 3.9
  Top Layer w0.25: U9.29 69.84,56.4 70.34,56.9 C12.2
NetC13_2: C13.2 L3.1 U5.6 U5.7 U5.8 | length 7.4
  Top Layer w0.25: U5.7@58.55,75.15 L3.1 C13.2
  Top Layer w0.4: U5.6 U5.7 ; U5.8 U5.7 ; U5.7@58.55,75.15 U5.7
NetC14_2: C14.2 L3.2 | length 1.2
  Top Layer w0.25: L3.2 C14.2
NetC16_2: C16.2 U1.1 | length 3.4
  Top Layer w0.25: C16.2 57.74,42.8 57.84,42.7 U1.1
NetD1_1: D1.1 R3.1 | length 1.9
  Top Layer w0.25: R3.1 55.75,27.3 D1.1
NetD1_2: D1.2 U6.8 | length 5.2
  Top Layer w0.25: D1.2 v2(57.1,28.9) ; U6.8 57.4,31.6 58.3,30.7 v2(58.312,30.7)
  Bottom Layer w0.25: v2(57.1,28.9) 58.312,30.113 v2(58.312,30.7)
NetD2_1: D2.1 R4.1 | length 6.5
  Top Layer w0.25: R4.1 53.335,26.565 57.815,26.565 D2.1
NetD3_2: D3.2 J2.1 | length 6.3
  Top Layer w0.25: J2.1 70.652,29.725 70.652,30.367
  Top Layer w0.35: J2.1 70.577,30.367 70.577,31.777 71.965,33.165 D3.2
NetD4_2: D4.2 R15.1 | length 1.7
  Top Layer w0.25: R15.1 81.9,80.6 D4.2
NetD5_2: D5.2 R16.1 | length 1.7
  Top Layer w0.25: R16.1 D5.2
NetD6_2: D6.2 R17.1 | length 1.7
  Top Layer w0.25: R17.1 D6.2
NetJ1_1: J1.1 U9.21 | length 32
  Top Layer w0.25: v1(62.25,58.15) 62.25,55 65.5,51.75 65.5,49.97 U9.21 ; v2(64.4,65.95) 64.4,66.4 65.21,67.21 65.21,75.66 65.79,76.24 J1.1
  Bottom Layer w0.25: v1(62.25,58.15) 62.3,58.2 62.3,59.6 64.4,61.7 v2(64.4,65.95)
NetJ1_3: J1.3 U9.23 | length 29.1
  Top Layer w0.25: v1(64.5,58.1) 64.5,55.4 66.3,53.6 66.3,52.1 66.8,51.6 U9.23 ; v2(66,64.85) 66,65.79 65.62,66.17 65.62,74.52 66.07,74.97 J1.3
  Bottom Layer w0.25: v1(64.5,58.1) 64.5,59.25 66,60.75 v2(66,64.85)
NetJ1_5: J1.5 U9.22 | length 29.5
  Top Layer w0.25: v1(63.35,58.15) 63.35,54.9 65.89,52.36 65.89,51.93 66.35,51.47 U9.22 ; v2(66.7,66) 66.55,66.15 66.03,66.67 66.03,68.4 66.05,68.42 66.05,73.35 66.4,73.7 J1.5
  Bottom Layer w0.25: v1(63.35,58.15) 63.35,59.45 65.25,61.35 65.25,65.3 65.95,66 v2(66.7,66)
NetJ1_9: J1.9 U9.24 | length 23.3
  Top Layer w0.25: v1(65.65,58.1) 65.65,55.1 66.8,53.95 66.8,52.6 67.05,52.35 67.98,52.35 U9.24 ; v2(67.9,65.95) 67.9,67.1 66.6,68.4 66.6,70.171 67.589,71.16 J1.9
  Bottom Layer w0.25: v1(65.65,58.1) 65.65,59.15 66.9,60.4 66.9,64.95 v2(67.9,65.95)
NetL2_2: L2.2 U1.3 | length 9.3
  Top Layer w0.25: U1.3 57.227,41.7 57.142,41.615 56.515,41.615 55.7,40.8 55.7,37.5 57,36.2 L2.2
NetP2_1: P2.1 R19.2 R21.1 U9.37 | length 90.4
  Top Layer w0.25: v2(38.7,61.85) 38.65,61.8 38.65,52.387 42.45,48.587 R21.1 R19.2 ; v2(62.85,64.3) 63.95,63.2 U9.37
  Bottom Layer w0.25: v2(38.7,61.85) 39.65,62.8 53.05,62.8 55.5,65.25 59.9,65.25 60.85,64.3 v2(62.85,64.3) 63.4,64.85 63.4,66.2 81.25,84.05 P2.1
NetP2_2: P2.2 R18.2 R20.1 U9.36 | length 82.7
  Top Layer w0.25: U9.36 64.75,62.532 66.218,64 v2(69.1,64) 69.1,64.85 69.85,65.6 73.5,65.6 v2(74.9,67) ; v2(81.55,63.6) 81.55,47.4 80.8,46.65 R18.2 80.825,41.675 82.875,41.675 R20.1
  Bottom Layer w0.25: v2(69.1,64) 75.5,64 75.95,63.55 81.5,63.55 v2(81.55,63.6) ; v2(74.9,67) 80.75,72.85 90.75,72.85 92.65,74.75 92.65,78.6 96.5,82.45 96.5,83.94 P2.2
NetP2_4: P2.4 U9.31 | length 49.2
  Top Layer w0.25: U9.31 69.4,58 72.05,60.65 73.8,60.65 76.35,63.2 v2(76.35,65.35)
  Bottom Layer w0.25: v2(76.35,65.35) 82.3,71.3 92.2,71.3 95.9,75 95.9,78.5 98.25,80.85 100.9,80.85 101.69,81.64 P2.4
NetP2_5: P2.5 U9.30 | length 51.5
  Top Layer w0.25: U9.30 69.8,57.2 72.39,59.79 74.02,59.79 77.3,63.07 v2(77.3,64.55)
  Bottom Layer w0.25: v2(77.3,64.55) 83.05,70.3 92.75,70.3 97.3,74.85 97.3,78.07 98.63,79.4 102,79.4 104.23,81.63 P2.5
NetP3_2: P3.2 U9.16 | length 62.2
  Top Layer w0.25: U9.16 61.55,48 62.81,46.74 77.64,46.74 v2(77.7,46.8)
  Bottom Layer w0.25: v2(77.7,46.8) 79.75,46.8 82.1,44.45 104.3,44.45 107.7,41.05 110.1,41.05 111.05,40.1 111.05,38.5 114.375,35.175 115.425,35.175 P3.2
NetP3_3: P3.3 U9.15 | length 64.8
  Top Layer w0.25: U9.15 60.75,47.55 62.4,45.9 77.65,45.9 v2(77.7,45.95)
  Bottom Layer w0.25: v2(77.7,45.95) 79.35,45.95 81.6,43.7 98.5,43.7 99.85,42.35 103.66,42.35 107.1,38.91 107.1,38.85 108,37.95 109.45,37.95 110.95,36.45 110.95,34.05 112.44,32.56 P3.3
NetR5_2: R5.2 R6.2 | length 3.9
  Top Layer w0.25: R5.2 R5.2@41.3,70.55 ; R6.2@41.25,74 R6.2
  Top Layer w0.75: R5.2 R6.2@41.25,74
NetR6_1: R6.1 T1.3 | length 4.5
  Top Layer w0.25: R6.1 R6.1@42.125,79.425
  Top Layer w0.45: R6.1@42.125,79.425 T1.3
NetR7_1: R7.1 U6.2 | length 5.6
  Top Layer w0.25: v2(54.2,31.95) 54.295,31.95 54.445,32.1 U6.2 ; R7.1 54.25,35.9 54.7,35.45 v2(54.7,34.7)
  Bottom Layer w0.25: v2(54.2,31.95) 54.25,32 54.25,33.85 54.7,34.3 v2(54.7,34.7)
NetR8_2: R8.2 R10.1 U1.7 | length 7.8
  Top Layer w0.25: U1.7 v2(62.15,41.2) ; v2(64.35,39) 64.375,39.025 66.325,39.025 R10.1 R8.2
  Bottom Layer w0.25: v2(62.15,41.2) 63.6,39.75 v2(64.35,39)
NetR9_1: R9.1 U6.4 | length 6.7
  Top Layer w0.25: R9.1 52.35,35.35 52.475,35.225 52.975,35.225 v2(53.5,34.7) ; v2(53.5,31.1) U6.4
  Bottom Layer w0.25: v2(53.5,31.1) v2(53.5,34.7)
NetR9_2: R9.2 RT1.2 U6.5 | length 18.8
  Top Layer w0.25: RT1.2 51.3,40.85 51.3,34 51.3,31.7 52.485,30.515 55.065,30.515 U6.5
NetR22_1: R22.1 U7.7 | length 5.5
  Top Layer w0.2: U7.7@107.239,75.925 v2@108.65,74.514
  Top Layer w0.25: v2(108.65,74.45) v2@108.65,74.514 ; v2(110.7,74.3) 110.75,74.25 R22.1
  Bottom Layer w0.25: v2(108.65,74.45) 108.8,74.3 v2(110.7,74.3)
NetR23_1: R23.1 U7.21 | length 3.4
  Top Layer w0.2: R23.1@101.4,79.25 103.485,77.165 U7.21@103.874,77.165
  Top Layer w0.25: R23.1@101.4,79.25 R23.1
NetSMT2_P$1: SMT2.P$1 U5.11 | length 8.4
  Top Layer w0.75: SMT2.P$1 46.8,83.225 46.8,77.45 ccw(c48.424,77.777) U5.11@48.6,76.131
P\G\: D2.2 U6.6 U6.7 | length 2.9
  Top Layer w0.25: U6.7 U6.6 57.175,30.6 57.175,30.225 D2.2
RFH: SMT1.P$1 U3.23 | length 11
  Top Layer w0.75: U3.23@109.957,54.58 cw(c109.957,52.58) 111.957,52.58 111.957,47.85 ccw(c113.957,47.85) SMT1.P$1@113.957,45.85
RFL: SMT3.P$1 U3.25 | length 11
  Top Layer w0.75: U3.25@109.957,57.12 ccw(c109.957,59.12) 111.957,59.12 111.957,63.85 cw(c113.957,63.85) SMT3.P$1@113.957,65.85
RST: btn3.1 btn3.2 C15.2 J1.6 P3.1 R1.1 U3.32 U9.4 | length 146.8
  Top Layer w0.25: U9.4 v1(60.35,57.2) ; J1.6 72.732,73.65 v2(76.55,73.65) ; v2(82.2,52.85) 82.25,52.8 v2(82.25,50.1) ; v2(89.1,67.45) 89.144,67.45 btn3.2@91.3,69.606 ; v2(89.6,75.4) 91.294,75.4 btn3.1 ; R1.1 92.75,78 91.3,76.55 btn3.1 ; U3.32 103.247,68.303 102.5,69.05 99.65,69.05 98.9,68.3 92.806,68.3 91.775,69.331 91.575,69.331 btn3.2@91.3,69.606 ; btn3.2@91.3,69.606 btn3.2 btn3.1
  Bottom Layer w0.25: v1(60.35,57.2) 66.45,57.2 70.15,60.9 v2(70.15,60.95) ; v2(76.55,73.65) 87.85,73.65 v2(89.6,75.4) ; v2(82.2,52.85) 82.2,52.9 74.85,60.25 70.85,60.25 v2(70.15,60.95) ; v2(82.25,50.1) 82.25,46 82.85,45.4 105.15,45.4 107.4,43.15 111.05,43.15 113,41.2 113,38.9 114.26,37.64 P3.1 P3.1@115.165,37.305 ; v2(89.1,67.45) 84.4,62.75 72,62.75 70.2,60.95 v2(70.15,60.95)
RX0: TP7.1 U3.7 U9.9 | length 55.4
  Top Layer w0.25: v2(53.8,51.15) 53.8,52.25 54.75,53.2 U9.9 ; v2(72.3,47.6) 72.4,47.5 75.5,47.5 v2(75.55,47.55) ; v2(90.65,40.65) 90.65,42.1 TP7.1 91.817,43.267 U3.7
  Bottom Layer w0.25: v2(53.8,51.15) 53.8,50.85 56,48.65 62.1,48.65 63.15,47.6 v2(72.3,47.6) ; v2(75.55,47.55) 75.55,44.5 80.7,39.35 89.35,39.35 v2(90.65,40.65)
RX1: C23.1 TP5.1 U5.3 U9.11 | length 32
  Top Layer w0.25: v2(55,63.5) 55.067,63.433 55.667,63.433 56,63.1 57.6,63.1 C23.1 59.05,64.55 59.05,65.3 62.95,69.2 62.95,70.4 62,71.35 60.4,71.35 59.7,70.65 U5.3 ; U9.11 57.75,51.6 58.3,52.15 v2(58.3,56.4)
  Bottom Layer w0.25: v2(55,63.5) 55,59.7 v2(58.3,56.4)
SCK0: U2.6 U9.3 | length 17.6
  Top Layer w0.25: U2.6 45.435,59.275 46.61,60.45 57.298,60.45 58.7,59.048 58.7,58.4 58.45,58.15 56.82,58.15 U9.3
SCL: R13.2 TP9.1 U7.23 U9.19 | length 58
  Top Layer w0.2: R13.2 101.975,76.75 102.375,76.35 U7.23
  Top Layer w0.25: U9.19 63.95,48.067 64.317,47.7 70.55,47.7 v2(74.675,51.825) ; v2(99.25,73.85) 99.25,73.923 101.35,76.023 R13.2
  Bottom Layer w0.25: v2(74.675,51.825) 74.7,51.85 83,51.85 99.25,68.1 v2(99.25,73.85)
SDA: R14.2 TP10.1 U7.24 U9.20 | length 55.2
  Top Layer w0.2: 103.05,75.95 U7.24
  Top Layer w0.25: U9.20 64.75,48.745 64.896,48.599 70.249,48.599 v2(72.35,50.7) ; 101.25,73.05 101.25,73.65 102.65,75.05 102.65,75.55 103.05,75.95 ; v2(101.3,69.65) TP10.1 101.3,73.05
  Bottom Layer w0.25: v2(72.35,50.7) 75.65,50.7 75.95,51 84,51 101.3,68.3 v2(101.3,69.65)
SS0: U2.1 U9.44 | length 28.1
  Top Layer w0.25: U2.1 42.895,52.225 41.5,53.62 41.5,59.5 44.6,62.6 58.1,62.6 58.35,62.35 U9.44 U9.44@58.35,61.805
TOSC1: C1.2 U9.25 Y1.1 | length 11.1
  Top Layer w0.25: U9.25 75.65,53.2 C1.2 78.35,52.2 Y1.1
TOSC2: C3.2 U9.26 Y1.2 | length 10.8
  Top Layer w0.25: U9.26 76.2,54 C3.2 78.55,54.4 Y1.2
TX0: TP8.1 U3.6 U9.10 | length 49.5
  Top Layer w0.25: v2(55.95,50.1) 54.85,51.2 54.85,51.85 55.4,52.4 U9.10 ; v2(73.4,48.4) 73.55,48.25 v2(76.85,48.25) ; v2(87.6,40.65) 87.6,42 TP8.1 90.547,44.947 U3.6
  Bottom Layer w0.25: v2(55.95,50.1) 56.6,49.45 62.75,49.45 63.8,48.4 v2(73.4,48.4) ; v2(76.85,48.25) 76.85,44.65 80.85,40.65 v2(87.6,40.65)
TX1: C24.2 TP6.1 U5.2 U9.12 | length 28.5
  Top Layer w0.25: v2(56,64.1) C24.2 56,66 57.1,67.1 59.7,67.1 60.9,68.3 60.9,68.512 TP6.1@61.086,68.697 ; U9.12 58.325,49.945 58.4,50.02 58.4,51.3 60,52.9 v1(60,56.15) ; U5.2 58.775,69.225 60.723,69.225 61.086,68.862 TP6.1@61.086,68.697 ; TP6.1 61.3,68.912 TP6.1@61.086,68.697
  Bottom Layer w0.25: v2@56,64 56,61.25 59.45,57.8 59.45,56.6 59.495,56.6 59.945,56.15 v1(60,56.15)
Vbat: B.1 C7.1 C8.1 C18.1 L2.1 R3.2 R4.2 R8.1 R19.1 TP12.1 U1.5 U1.6 U1.8 U6.10 U8.3 U8.7 | length 100.1
  Top Layer w0.25: B.1@29.935,28.176 30.781,27.33 B.1@30.81,27.33 ; 42.45,36.725 R19.1 ; C8.1 46.2,36.6 46.575,36.225 46.575,35.125 v2(46.6,35.1) ; U8.3 46.775,29.925 47.387,29.313 47.387,28.338 U8.7 ; R4.2 R3.2 54.1,28.35 54.1,28.85 v2(54.4,29.15) ; U6.10 57.5,32.6 58,33.1 59.3,33.1 C7.1 59.625,32.525 59.625,32.428 58.947,31.75 v2(58.45,31.75) ; U1.5 58.407,40.7 58.422,40.685 58.422,40.185 59.092,39.515 60.24,39.515 61.075,40.35 ; U1.8 61.09,41.715 61.838,41.715 61.908,41.785 62.392,41.785 62.735,41.442 62.735,40.958 62.392,40.615 61.445,40.615 61.36,40.7 U1.6 61.075,40.35 ; v2(64.2,35.75) 64.7,35.25 65.95,35.25 66.3,35.6 66.3,36.383 R8.1 65.167,36.433 64.3,37.3 C18.1 62.35,38.45 61.075,39.725 61.075,40.35
  Top Layer w0.45: C8.1@45.625,36.175 45.625,34.725 46.15,34.2 46.45,34.2 46.775,33.875 U8.3 ; C7.1 60.4,32.65 60.92,33.17 L2.1 ; 60.927,37.3 C18.1
  Top Layer w1: B.1@32.65,34.65 37.75,34.65 39.7,36.6 42.575,36.6 C8.1
  Top Layer w1.5: B.1@29.935,28.176 29.935,30.173 28.27,31.838 28.27,34.95 B.1@33.35,34.95
  Bottom Layer w0.25: v2(46.6,35.1) 47.95,36.45 63.5,36.45 v2(64.2,35.75) ; v2(54.4,29.15) 55.833,30.583 57.283,30.583 v2(58.45,31.75)
VCC: btn1.1 btn1.2 btn2.1 btn2.2 C4.2 C17.1 C19.2 C20.2 C21.1 C22.2 J1.4 L1.1 R1.2 R11.1 R13.1 R14.1 TP11.1 U1.2 U1.10 U2.3 U2.7 U2.8 U3.12 U3.34 U4.1 U4.6 U7.13 U9.5 | length 269.7
  Top Layer w0.2: C4.2@106.45,81.4 106.45,78.764 106.464,78.75 U7.13
  Top Layer w0.25: v2(45.4,50.3) 45.4,50.35 v2@45.435,50.385 ; v2(52.95,55.3) C21.1 U9.5 ; v2(56.9,42.2) U1.2 ; U1.10 U1.10@61.087,42.713 ; v2(61.1,44) 61.087,43.988 U1.10@61.087,42.713 ; v2(64.4,43.9) 64.45,43.85 64.45,42.85 C17.1 64.415,42.715 61.09,42.715 U1.10@61.087,42.713 ; v2(72.15,43.9) v2@72.2,43.95 ; L1.1 L1.1@73.888,57.402 ; btn2.1@78,75.244 btn2.1 ; btn1.1 84.85,75.644 btn1.1@85.125,75.919 ; R1.2 98.05,79.1 99.3,77.85 v2(100.3,77.85) 100.3,76.8 R13.1 99.85,76.75 98.3,75.2 98.3,73.45 99,72.75 R14.1 ; C20.2 98.049,43.349 v2(98.05,41.8) v2(98.05,41.8) ; U3.12@98.047,46.84 U3.12 ; U3.34 U3.34@100.797,64.83 ; v2(105.35,80.4) 105.417,80.467 105.417,81.067 105.75,81.4 C4.2@106.45,81.4 ; v2@106.333,73.683 106.533,73.683 v2(106.6,73.75) R11.1
  Top Layer w0.3: C22.2 44.8,60.645 44.95,60.495 v2(44.95,60.4)
  Top Layer w0.4: L1.1@73.888,57.402 v2(73.888,59.112) 73.975,59.2 74.25,59.2 75.15,60.1 76.1,60.1 79.15,63.15 ; C20.2 U3.12@98.047,46.84 ; U3.34@100.797,64.83 C19.2
  Top Layer w0.5: U2.7 U2.8 42.895,59.845 44.45,61.4 44.75,61.4 C22.2 ; v2@45.435,50.385 U2.3 ; 79.15,63.15 79.15,67.7
  Top Layer w0.55: v2@72.2,43.95 U4.1 U4.6
  Top Layer w0.6: 78,68.85 79.15,67.7
  Top Layer w0.7: J1.4 73.711,74.97 73.985,75.244 78,75.244 btn2.2 78,68.85 ; btn2.1 78,75.644 78.275,75.919 78.475,75.919 79.356,76.8 83.494,76.8 84.375,75.919 84.575,75.919 btn1.1@84.85,75.644 ; btn1.2 btn1.1 ; btn1.1@85.125,75.919 85.869,75.919 86.9,76.95 90.4,76.95 91.5,78.05 91.5,80 92.05,80.55 93.85,80.55 94.35,80.05 R1.2
  Top Layer w0.75: U3.12 98.167,54.82 100.707,57.36 U3.34
  Bottom Layer w0.25: 44.441,60.909 44.441,61.109 ; v2(56.9,42.2) 58.7,44 v2(61.1,44) ; v2(72.15,43.9) 72.15,41.75 75.7,38.2 90.6,38.2 94.15,41.75 98,41.75 v2(98.05,41.8) ; v2(100.3,77.85) 103,77.85 105.283,80.133 105.283,80.333 v2(105.35,80.4) 106.679,80.4 107.4,79.679 107.4,74.55 v2(106.6,73.75)
  Bottom Layer w0.4: 69.05,55.35 72.813,59.112 v2(73.888,59.112)
  Bottom Layer w0.5: 44.441,60.909 v2(44.95,60.4) 47.85,60.4 v2(52.95,55.3) ; 44.441,61.109 43.9,61.65 40.8,61.65 39.95,60.8 39.95,55.75 v2(45.4,50.3) ; v2(64.4,43.9) v2(72.15,43.9) 72.15,45 74.65,47.5 74.65,48.7 73.85,49.5 71.25,49.5 70.2,50.55 63.55,50.55 61.7,52.4 53.75,52.4 52.95,53.2 v2(52.95,55.3) ; 69.05,55.35 53.027,55.35 52.977,55.3 v2(52.95,55.3)
Vcurr: P2.3 TP1.1 U4.5 U9.35 | length 73.5
  Top Layer w0.25: U9.35 65.55,62.7 66.1,63.25 71.1,63.25 72.35,62 v2(72.75,62) 75.5,64.75 75.5,66.15 v2(75.55,66.2) ; U4.5 79.1,43 79.5,43.4 TP1.1 79.5,50.4 80.15,51.05 80.15,56.5 v2(78,58.65)
  Bottom Layer w0.25: v2(72.75,62) 74.65,62 v2(78,58.65) ; v2(75.55,66.2) 75.55,66.25 81.4,72.1 91.3,72.1 94.7,75.5 94.7,79.05 97.5,81.85 98.65,81.85 99.15,82.35 P2.3
Vpanel: P1.1 R2.2 R18.1 TP2.1 U4.4 | length 18.6
  Top Layer w0.25: R2.2 79.236,39.136 80.75,40.65 R18.1
  Top Layer w0.5: U4.4@77.655,42.05 U4.4
  Top Layer w0.6: U4.4@77.655,42.05 76.35,40.745 R2.2 76.35,37.1 78.75,34.7
  Top Layer w0.7: 78.75,34.7 P1.1
pads on no net: J1.7 J1.8 J2.2 J2.3 J2.4 J3.2 J3.3 U3.2 U3.3 U3.4 U3.5 U3.9 U3.10 U3.13 U3.14 U3.15 U3.16 U3.17 U3.18 U3.19 U3.29 U3.30 U3.31 U3.35 U3.36 U3.37 U3.38 U3.39 U3.40 U3.42 U3.43 U3.44 U3.45 U3.46 U5.4 U5.9 U5.13 U5.14 U5.15 U5.16 U5.17 U5.18 U6.9 U7.1 U7.2 U7.3 U7.4 U7.5 U7.6 U7.9 U7.12 U7.14 U7.15 U7.16 U7.17 U7.19 U7.20 U7.25 U9.7 U9.8 U9.32 U9.33 U9.34 U9.38 U9.39 U9.43
copper on no net:
  other v2: 114,40

## Polygon pours and split planes (outlines as drawn)
GND on Top Layer "NONET_L01_P001" (solid, shelved, pour order 1): 119.3,89.35 119.3,24.75 24.6,24.75 24.6,88.75 24.1,88.75
no net on Top Layer "NONET_L01_P000" (solid, shelved, pour order 0): 24.05,89.3
GND on Bottom Layer "NONET_L02_P002" (solid, shelved, pour order 2): 24.6,88.85 119.45,88.85 119.45,24.85 24.6,24.85

## Keep-outs
Keep-Out Layer:
  lines w0.254: 25.5,25.5 25.5,88 119,88 119,25.5 25.5,25.5

## Silkscreen, mask and mechanical layers (free items; w line width, h text height)
Top Overlay:
  text "---" at 31.9,66.5 h3 r90
  text "+++" at 31.95,39.95 h3 r90

## Text inside footprints (layer, text, board x,y; h text height)
J2: Top 3D Body "PCB EDGE" at 64.677,25.4 h0.3